# EAGLE board m0xpdLooping ADSR v2.0 (EAGLE 9.6.2)
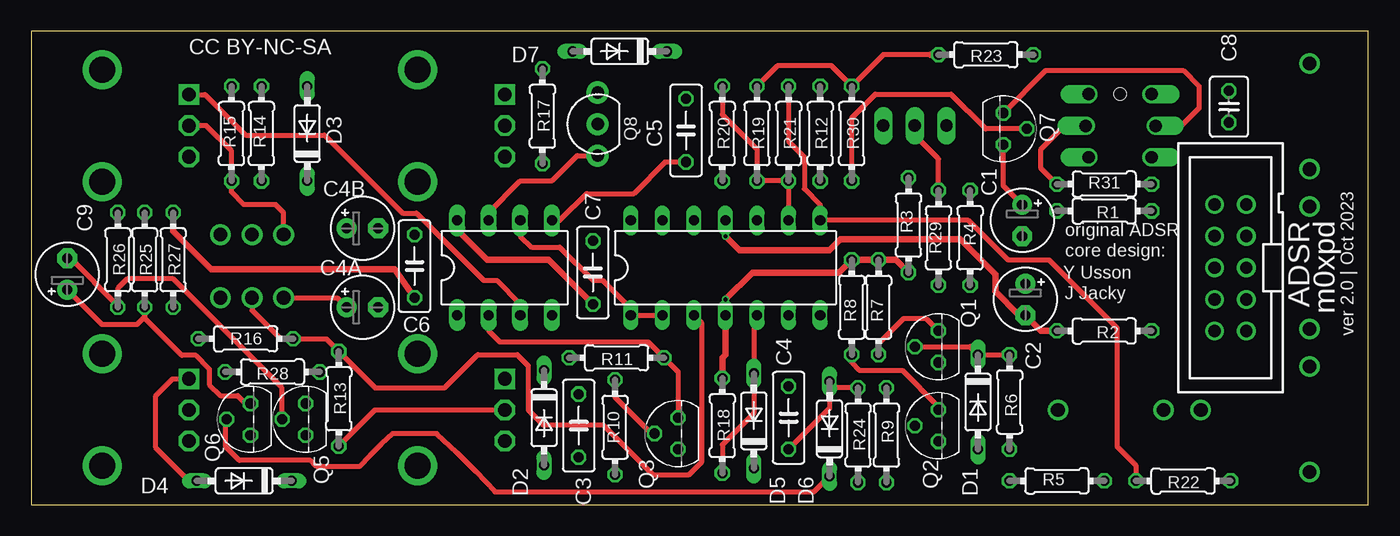
[diagram p0: board, top side]
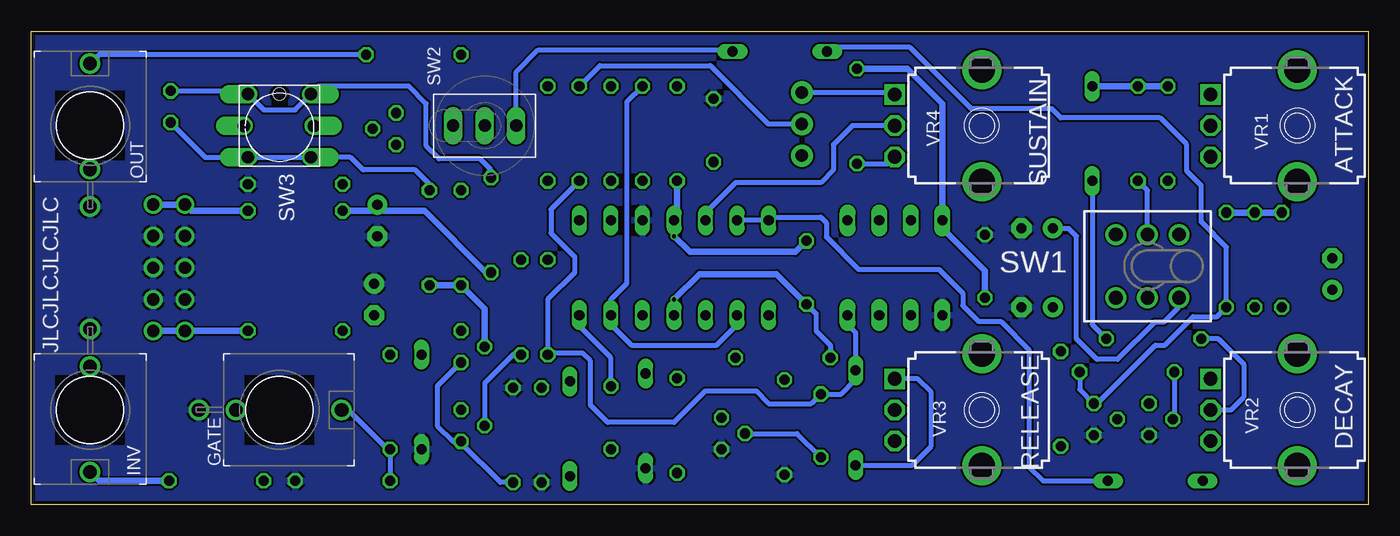
[diagram p1: board, bottom side, seen from below]

Size 107.62 x 38.09 mm. Coordinates in mm from the lower left corner, seen from the top.
Outline: 0,0 107.62,0 107.62,38.09 0,38.09 0,0
Copper layers (1*16): Top 0.035mm / dielectric 1.5mm / Bottom 0.035mm
Design rules "PCBWay_2L_152um-Track": minimum track width 6mil, minimum drill 0.3mm, track to track 6mil, track to pad 6mil, pad to pad 6mil, via to via 6mil, smd to smd 0mil, copper to edge 0.3mm, drill to drill 10mil, minimum pad ring 6mil, minimum via ring 0.1mm, stop-mask expansion 2mil, vias tented up to drill 0.45mm, thermal gap 0.2mm

## Footprints (pad centres in the part's own frame; a part is rotated, then mirrored left to right if it is on the bottom)
E2,5-5 = drill 0.813 pad 1.6: + -1.27,0 | drill 0.813 pad 1.6 octagon: - 1.27,0
C050-025X075 = drill 0.813 octagon: 1 -2.54,0; 2 2.54,0
C025-030X050 = drill 0.813 octagon: 1 -1.27,0; 2 1.27,0
DO35-7 = drill 0.813 long: A 3.81,0; C -3.81,0
WQP-PJ301M-12_JACK = drill 1.1: P$1_TIP 0,5; P$2_SWITCH 0,-3.5; P$3_SLEEVE 0,-6.5
DIL14 = drill 0.813 long: 1 -7.62,-3.81; 2 -5.08,-3.81; 3 -2.54,-3.81; 4 0,-3.81; 5 2.54,-3.81; 6 5.08,-3.81; 7 7.62,-3.81; 8 7.62,3.81; 9 5.08,3.81; 10 2.54,3.81; 11 0,3.81; 12 -2.54,3.81; 13 -5.08,3.81; 14 -7.62,3.81
DIL08 = drill 0.813 pad 1.27 long: 1 -3.81,-3.81; 2 -1.27,-3.81; 3 1.27,-3.81; 4 3.81,-3.81; 5 3.81,3.81; 6 1.27,3.81; 7 -1.27,3.81; 8 -3.81,3.81
TO92 = drill 0.813 octagon: 1 1.27,0; 2 0,1.905; 3 -1.27,0
TO92' = drill 1.016 pad 1.778: 1 -2.54,0; 2 0,0; 3 2.54,0
0204/7 = drill 0.813 octagon: 1 -3.81,0; 2 3.81,0
TL4XPO = drill 1.1 pad 1.676: 1 -2.54,2.54; 2 0,2.54; 3 2.54,2.54; 4 -2.54,-2.54; 5 0,-2.54; 6 2.54,-2.54
SUBMINI_TOGGLE = drill 1 pad 1.422 long: 1 -2.54,0; 3 2.54,0; COM 0,0
LOW_PROFILE_BUTTON = drill 1 offset: L$1 -2.875,-0.02; L$2 2.76,-0.02; P$1 2.54,-2.54; P$2 -2.54,-2.54; P$3 2.54,2.54; P$4 -2.54,2.54 | hole 1: 0,2.54
9MM_SNAP-IN_POT = drill 1.1 square: 1 -2.5,-7 | drill 1.1 octagon: 2 0,-7; 3 2.5,-7 | drill 2.1 pad 2.794: CHASSIS1 -4.5,0; CHASSIS2 4.5,0
PAK100/2500-10 = drill 1 pad 1.422: 1 -5.08,-1.27; 2 -5.08,1.27; 3 -2.54,-1.27; 4 -2.54,1.27; 5 0,-1.27; 6 0,1.27; 7 2.54,-1.27; 8 2.54,1.27; 9 5.08,-1.27; 10 5.08,1.27

## Placement (x,y rotation side)
C1  22u  [E2,5-5]  79.76,22.86 270 top
C2  22u  [E2,5-5]  80.01,16.51 270 top
C3  10n  [C050-025X075]  44.07,6.35 270 top
C4  100n  [C050-025X075]  60.96,6.99 90 top
C4A  10u  [E2,5-5]  26.67,15.88 0 top
C4B  1u  [E2,5-5]  26.67,22.23 0 top
C5  10n  [C050-025X075]  52.7,30.1 270 top
C6  100n  [C050-025X075]  30.86,19.18 90 top
C7  100n  [C050-025X075]  45.21,18.67 90 top
C8  100n  [C025-030X050]  96.39,32 270 top
C9  1u  [E2,5-5]  2.92,18.54 90 top
D1  1N4148DO35-7  [DO35-7]  76.2,8.26 270 top
D2  1N4148DO35-7  [DO35-7]  41.27,6.99 270 top
D3  1N4148DO35-7  [DO35-7]  22.23,29.84 90 top
D4  1N4148DO35-7  [DO35-7]  17.14,1.91 180 top
D5  1N4148DO35-7  [DO35-7]  58.17,6.73 90 top
D6  1N4148DO35-7  [DO35-7]  64.26,6.1 90 top
D7  1N4148DO35-7  [DO35-7]  47.37,36.45 180 top
GATE  THONKICONNNEW  [WQP-PJ301M-12_JACK]  87.63,7.62 270 bottom
IC1  TL074P  [DIL14]  55.88,19.05 0 top
IC2  7555  [DIL08]  38.1,19.05 0 top
INV  THONKICONNNEW  [WQP-PJ301M-12_JACK]  102.87,7.62 180 bottom
OUT  THONKICONNNEW  [WQP-PJ301M-12_JACK]  102.87,30.48 0 bottom
Q1  2N3904  [TO92]  73.03,12.7 90 top
Q2  2N3904  [TO92]  73.03,6.35 90 top
Q3  2N3904  [TO92]  52.07,5.71 90 top
Q5  2N3904  [TO92]  22.1,6.86 90 top
Q6  2N3904  [TO92]  17.65,6.86 90 top
Q7  2N3904  [TO92]  78.23,30.23 270 top
Q8  2N7000  [TO92']  45.59,30.61 90 top
R1  10  [0204/7]  86.36,23.62 0 top
R2  10  [0204/7]  86.36,13.97 0 top
R3  10k  [0204/7]  70.61,22.48 90 top
R4  47k  [0204/7]  75.56,21.46 90 top
R5  1M2  [0204/7]  82.55,1.91 180 top
R6  100k  [0204/7]  78.74,8.26 270 top
R7  22k  [0204/7]  68.2,15.88 270 top
R8  22k  [0204/7]  66.04,15.88 270 top
R9  10  [0204/7]  68.83,5.59 90 top
R10  22k  [0204/7]  46.99,6.22 270 top
R11  22k  [0204/7]  47.12,11.81 0 top
R12  1M  [0204/7]  63.5,29.84 90 top
R13  100  [0204/7]  24.77,8.51 90 top
R14  120  [0204/7]  18.54,29.84 90 top
R15  680  [0204/7]  16.13,29.84 90 top
R16  100  [0204/7]  17.27,13.34 0 top
R17  4k7  [0204/7]  41.15,31.24 90 top
R18  68k  [0204/7]  55.63,6.35 90 top
R19  100k  [0204/7]  58.42,29.84 90 top
R20  150k  [0204/7]  55.63,29.84 90 top
R21  100k  [0204/7]  60.96,29.84 90 top
R22  1k  [0204/7]  92.71,1.91 0 top
R23  1k  [0204/7]  76.83,36.2 0 top
R24  10k  [0204/7]  66.55,5.59 90 top
R25  10k  [0204/7]  9.14,19.68 90 top
R26  150k  [0204/7]  6.99,19.68 90 top
R27  10k  [0204/7]  11.43,19.68 90 top
R28  10k  [0204/7]  19.43,10.67 180 top
R29  2k2  [0204/7]  73.03,21.46 270 top
R30  12k  [0204/7]  66.04,29.84 90 top
R31  2k2  [0204/7]  86.36,25.78 180 top
SW1  TL46PO  [TL4XPO]  17.78,19.18 180 bottom
SW2  SUBMINI_SPDT  [SUBMINI_TOGGLE]  71.12,30.48 0 bottom
SW3  THONK_LED_BUTTON  [LOW_PROFILE_BUTTON]  87.63,30.48 0 bottom
VR1  1MLOG  [9MM_SNAP-IN_POT]  5.71,30.48 270 bottom
VR2  1MLOG  [9MM_SNAP-IN_POT]  5.71,7.62 270 bottom
VR3  1MLOG  [9MM_SNAP-IN_POT]  31.11,7.62 270 bottom
VR4  10kLIN  [9MM_SNAP-IN_POT]  31.11,30.48 270 bottom
X1  2510-  [PAK100/2500-10]  96.52,19.05 90 top

## Library data of the parts
C1-C4 C4A C4B C5-C9 = rcl; SPICEPREFIX: C
D1-D7 = diode
GATE INV OUT VR1-VR4 = MusicThingModular
IC1 = linear
IC2 SW2 SW3 = MyLibrary
Q1-Q3 Q5-Q7 = transistor-npn
Q8 = transistors-FET
R1-R31 = rcl; SPICEPREFIX: R
SW1 = switch
X1 = con-3m; MF: 3M; MPN: 2510-6002UB; OC_FARNELL: 9838244; OC_NEWARK: 46F4725

## Nets
+12V: C1.+ C6.1 C7.1 IC1.4 IC2.8 Q7.1 R1.1 R3.1 R7.1 R8.1 R11.1 R17.2 R18.2 R25.2 R26.2 R27.2
-12V: C2.- C7.2 IC1.11 R2.1 R20.1
GND: C1.- C2.+ C4A.- C4B.- C5.1 C6.2 D1.A D5.C GATE.P$3_SLEEVE IC1.10 IC2.1 INV.P$3_SLEEVE OUT.P$3_SLEEVE Q3.3 Q5.3 Q6.3 R5.1 R9.2 R10.2 R24.1 R31.1 X1.3 X1.4 X1.5 X1.6 X1.7 X1.8
LED+: Q7.3 SW3.L$1
LED-: R31.2 SW3.L$2
N$1: R1.2 X1.9 X1.10
N$2: GATE.P$1_TIP R5.2 R6.2
N$3: D1.C Q1.2 R4.1 R6.1 R29.2
N$4: Q1.3 Q2.3 R9.1
N$5: R2.2 X1.1 X1.2
N$6: IC2.3 VR1.1
N$7: Q1.1 Q2.2 R7.2
N$8: C3.2 Q3.2 R10.1
N$9: IC2.2 Q3.1 R11.2
N$10: C5.2 IC2.5
N$11: C3.1 D2.C IC2.4 Q2.1 R8.2 R12.1
N$12: Q8.2 R12.2
N$13: IC2.7 Q8.1
N$14: D2.A VR3.1
N$15: Q8.3 VR4.1
N$16: R17.1 VR4.3
N$17: R13.1 VR3.2
N$18: R15.1 SW1.6 VR1.2
N$19: R14.1 SW1.5
N$20: D3.A R14.2 R15.2
N$21: D3.C IC1.3 R13.2 R16.2 SW1.2
N$22: R16.1 VR2.2
N$23: C4A.+ SW1.3
N$24: C4B.+ SW1.1
N$25: IC1.1 IC1.2 IC1.6 IC2.6 R19.2 R23.1 R30.2
N$26: IC1.12 VR4.2
N$27: D4.C IC1.13 IC1.14
N$28: D4.A VR2.1
N$29: D5.A IC1.5 R18.1
N$30: IC1.9 R19.1 R20.2 R21.1
N$31: C4.2 IC1.7
N$32: IC1.8 R21.2 R22.1
N$33: INV.P$1_TIP R22.2
N$34: OUT.P$1_TIP R23.2
N$35: C8.1 R3.2 SW3.P$3 SW3.P$4
N$36: C8.2 R4.2 SW3.P$1 SW3.P$2
N$37: C4.1 D6.A R24.2
N$38: D7.A Q5.1 R27.1 R28.1
N$39: C9.+ Q6.1 R25.1
N$40: R29.1 SW2.COM
N$41: C9.- Q5.2 R26.1
N$42: D7.C SW2.3
N$43: D6.C Q6.2 R28.2
N$45: Q7.2 R30.1

## Tracks (layer width: path | path; a pad name or v marks a point on that pad's centre or on a via)
+12V  (via drill 0.35)
  Top 0.406: C1.+ 78.23,25.65 Q7.1
  Top 0.508: R3.1 69.6,19.68 R7.1 R8.1 65.02,18.67 58.04,18.67 v55.88,16.51 IC1.4 55.88,12.06 55.63,11.81 R18.2 | C7.1 41.66,19.68 36.7,19.68 34.29,22.1 IC2.8 | C6.1 29.25,18.92 14.48,18.92 11.43,21.97 R27.2
  Bottom 0.406: C7.1 44.45,15.37 44.45,13.97 43.31,12.83 R11.1
  Bottom 0.508: v55.88,16.51 53.85,18.54 47.62,18.54 C7.1 | R3.1 70.99,18.67 75.95,23.62 79.25,23.62 C1.+ 80.26,23.62 R1.1 | R26.2 R25.2 R27.2 | R17.2 37.08,35.05 34.29,32.26 IC2.8 34.29,22.23 30.86,18.8 C6.1
-12V  (via drill 0.35)
  Top 0.508: R2.1 81.28,13.97 C2.- 79.5,15.24 77.6,17.14 77.6,18.54 74.8,21.34 65.15,21.34 64.26,20.45 57.02,20.45 v55.88,21.59
  Bottom 0.508: C7.2 46.1,20.32 54.61,20.32 v55.88,21.59 IC1.11 55.63,23.11 R20.1
GND
  pour Bottom: 0,38.1 107.31,38.1 107.31,0 0,0
LED+
  Top 0.406: Q7.3 81.66,34.92 92.71,34.92 93.98,33.66 93.98,31.88 92.56,30.46 SW3.L$1
LED-
  Top 0.406: R31.2 81.28,27.05 81.28,28.57 83.17,30.46 SW3.L$2
N$1
  Bottom 0.508: X1.9 X1.10 94.74,23.62 R1.2
N$2
  Bottom 0.406: R5.2 R6.2 78.95,4.45 82.12,7.62 GATE.P$1_TIP
N$3
  Top 0.406: Q1.2 75.56,12.7 D1.C R6.1
  Bottom 0.406: 71.12,13.21 Q1.2
  Bottom 0.508: R4.1 R29.2 71.12,15.75 71.12,13.21
N$4
  Bottom 0.406: Q1.3 74.93,9.53 74.93,6.35 73.66,5.08 Q2.3 73.03,4.95 69.85,1.78 R9.1
N$5
  Bottom 0.508: X1.1 X1.2 R2.2
N$6
  Top 0.406: IC2.3 39.37,16.13 37.47,18.03 36.42,18.03 31.01,23.44 29.9,23.44 23.62,29.72 17.27,29.72 14.01,32.98 VR1.1
N$7
  Top 0.406: R7.2 68.2,12.95 70.23,14.99 72.01,14.99 Q1.1
  Bottom 0.406: R7.2 68.83,12.06 71.12,9.78 Q2.2
N$8
  Top 0.406: Q3.2 49.91,5.71 46.99,8.64 R10.1
  Bottom 0.406: C3.2 45.97,5.71 Q3.2
N$9
  Top 0.406: Q3.1 52.07,10.67 R11.2 49.66,13.08 37.72,13.08 36.83,13.97 IC2.2
N$10
  Top 0.406: IC2.5 42.55,22.86 44.7,25.02 48.51,25.02 51.05,27.56 C5.2
N$11
  Top 0.406: R8.2 66.04,11.43 66.67,10.79 70.1,10.79 73.03,7.87 Q2.1
  Bottom 0.406: 41.27,10.03 42.42,8.89 C3.1 44.83,8.13 48.26,8.13 49.28,9.14 53.34,9.14 55.88,6.6 61.21,6.6 62.61,8 62.61,11.56 63.25,12.19 65.91,12.19 R8.2 66.04,16.51 63.88,18.67 63.88,19.94 65.79,21.84 65.79,23.75 R12.1 | IC2.4 41.91,14.48 41.27,13.84 D2.C
  Bottom 0.508: D2.C 41.27,10.03
N$12
  Bottom 0.406: R12.2 61.85,35.31 52.96,35.31 48.26,30.61 Q8.2
N$13
  Top 0.406: IC2.7 36.83,23.5 39.37,26.04 41.91,26.04 43.94,28.07 Q8.1
N$14
  Bottom 0.406: VR3.1 36.28,10.12 35.18,9.02 35.18,4.7 36.7,3.17 D2.A
N$15
  Bottom 0.406: VR4.1 38.28,33.15 Q8.3
N$16
  Bottom 0.406: R17.1 38.66,27.43 VR4.3
N$17
  Top 0.406: R13.1 27.69,7.62 VR3.2
N$18
  Top 0.406: VR1.2 14.1,30.48 16.13,28.45 R15.1 16.13,25.15 17.14,24.13 19.68,24.13 20.32,23.5 SW1.6
N$19
  Bottom 0.406: SW1.5 17.78,25.27 R14.1
N$20
  Bottom 0.508: D3.A R14.2 R15.2
N$21
  Top 0.406: SW1.2 17.78,15.62 20.07,13.34 R16.2 23.75,13.34 R13.2 27.69,9.4 33.27,9.4 35.94,12.06 39.12,12.06 40.01,11.18 40.01,7.62 41.21,6.41 46.04,6.41 50.04,2.41 52.96,2.41 53.98,3.43 53.98,14.61 IC1.3
  Bottom 0.406: D3.C 22.23,14.48 R16.2
N$22
  Bottom 0.406: VR2.2 11.05,7.62 10.03,8.64 10.03,11.3 12.06,13.34 R16.1
N$23
  Top 0.406: SW1.3 24.64,16.64 C4A.+
N$24
  Bottom 0.406: C4B.+ 24.13,22.23 23.5,21.59 23.5,13.34 21.84,11.68 20.19,11.68 17.21,14.67 16.45,14.67 15.37,15.75 15.37,16.51 SW1.1
N$25
  Top 0.406: R19.2 60.07,35.31 64.39,35.31 R30.2 68.58,36.2 72.39,36.2 | IC2.6 39.37,21.59 40.26,20.7 42.55,20.7 45.21,18.03 45.97,18.03 48.26,15.75 IC1.1 IC1.2
  Top 0.508: R23.1 72.39,36.2
  Bottom 0.406: IC1.2 50.8,14.48 52.45,12.83 59.31,12.83 60.96,14.48 IC1.6 60.96,16.51 59.69,17.78 59.69,32.38 R19.2
N$26
  Bottom 0.406: VR4.2 41.53,30.48 43.05,28.96 43.05,26.92 44.07,25.91 50.93,25.91 53.34,23.5 IC1.12
N$27
  Bottom 0.406: D4.C 26.16,1.91 27.3,3.05 27.3,12.45 29.59,14.73 31.37,14.73 32.64,16 32.64,17.02 34.54,18.92 41.02,18.92 43.62,21.53 43.62,22.67 44.07,23.11 48.01,23.11 IC1.14 IC1.13
N$28
  Top 0.406: D4.A 12.7,1.91 10.03,4.57 10.03,8.76 11.39,10.12 VR2.1
N$29
  Top 0.406: IC1.5 58.17,14.99 D5.A 58.17,7.37 55.63,4.83 R18.1
N$30
  Top 0.406: IC1.9 R21.1 R19.1 58.42,28.57 55.63,31.37 R20.2
N$31
  Bottom 0.406: C4.2 60.96,11.81 63.5,14.35 IC1.7
N$32
  Top 0.406: R22.1 88.9,3.17 87.38,4.7 87.38,14.22 81.92,19.68 78.61,19.68 75.44,22.86 IC1.8 63.5,24.13 62.23,25.4 62.23,27.94 60.96,29.21 R21.2
N$33
  Bottom 0.508: INV.P$1_TIP 102.16,1.91 R22.2
N$34
  Bottom 0.406: R23.2 102.16,36.2 OUT.P$1_TIP
N$35
  Bottom 0.406: R3.2 70.61,26.92 71.5,27.81 74.8,27.81 75.82,28.83 75.82,32.26 77.22,33.66 84.45,33.66 SW3.P$3 86.36,31.75 88.9,31.75 SW3.P$4 90.42,33.27 C8.1
N$36
  Bottom 0.406: R4.2 75.56,25.78 76.71,26.92 80.9,26.92 81.92,27.94 SW3.P$1 SW3.P$2 93.6,27.94 C8.2
N$37
  Top 0.406: R24.2 64.77,9.4 D6.A 64.26,7.75 C4.1
N$38
  Bottom 0.406: D7.A 43.19,36.82 36.95,36.82 32,31.88 25.53,31.88 24.77,31.11 16.76,31.11 14.63,28.98 14.63,26.82 13.46,25.65 13.46,22.73 11.43,20.7 R27.1 12.19,15.11 14.1,15.11 16.38,12.83 17.14,12.83 21.84,8.13 Q5.1 23.24,9.27 R28.1
N$39
  Top 0.406: Q6.1 17.27,8.13 16.64,8.76 15.24,8.76 14.35,9.65 14.35,10.92 13.27,12 12.13,12 9.14,14.99 R25.1 9.14,15.11 8.51,14.48 5.71,14.48 C9.+
N$40
  Top 0.406: R29.1 73.03,27.81 71.12,29.72 SW2.COM
N$41
  Top 0.406: Q5.2 20.19,9.4 11.43,18.16 7.75,18.16 6.99,17.4 R26.1 6.99,16 3.17,19.81 C9.-
N$42
  Bottom 0.406: SW2.3 68.58,34.8 66.8,36.58 51.31,36.58 D7.C
N$43
  Top 0.406: D6.C 62.99,1.02 37.34,1.02 arc6 32.64,5.71 29.08,5.71 arc6 26.42,3.05 22.99,3.05 22.48,3.56 16.76,3.56 15.62,4.7 15.62,6.73 Q6.2
  Bottom 0.406: Q6.2 15.62,6.99 R28.2
N$45
  Top 0.406: R30.1 66.04,31.11 67.94,33.02 74.04,33.02 76.83,30.23 Q7.2

## Text on the board
tNames: CC BY-NC-SA | original ADSR | core design: | Y Usson | J Jacky | ADSR | m0xpd | ver 2.0 | Oct 2023
bNames: SUSTAIN | ATTACK | JLCJLCJLCJLC | RELEASE | DECAY